# EAGLE board ControllerBoard 2 (EAGLE 5.03)

Size 100 x 80 mm. Coordinates in mm from the lower left corner, seen from the top.
Outline: 0,0 100,0 100,80 0,80 0,0
Copper layers (1*16): Top 0.035mm / dielectric 1.5mm / Bottom 0.035mm
Design rules "default": minimum track width 10mil, minimum drill 24mil, track to track 8mil, track to pad 8mil, pad to pad 8mil, via to via 8mil, smd to smd 8mil, copper to edge 40mil, drill to drill 8mil, minimum pad ring 10mil, minimum via ring 8mil, stop-mask expansion 4mil, vias tented up to drill 0mil, thermal gap 10mil

## Footprints (pad centres in the part's own frame; a part is rotated, then mirrored left to right if it is on the bottom)
3,81/1,4 = drill 1.397 pad 3.81 octagon: 1 0,0
EB22,5D = drill 2.007 pad 4.597 round: + -5.08,0 | drill 2.007 pad 4.597 octagon: - 5.08,0
E2,5-5 = drill 0.813 pad 1.6 round: + -1.27,0 | drill 0.813 pad 1.6 octagon: - 1.27,0
C025_050-045X075 = drill 0.813 octagon: 1 -1.27,0; 2 1.27,0; 3 3.81,0
TO220ABS = drill 1.016 long: A1 -2.54,-2.54; A2 2.54,-2.54; C 0,-2.54
DO41-10 = drill 1.118 round: A 5.08,0; C -5.08,0
DO35Z10 = drill 0.813 long: A 5.08,0; C -5.08,0
4,1 = hole 4.1: 0,0
DIL28-3 = drill 0.813 long: 1 -16.51,-3.81; 2 -13.97,-3.81; 3 -11.43,-3.81; 4 -8.89,-3.81; 5 -6.35,-3.81; 6 -3.81,-3.81; 7 -1.27,-3.81; 8 1.27,-3.81; 9 3.81,-3.81; 10 6.35,-3.81; 11 8.89,-3.81; 12 11.43,-3.81; 13 13.97,-3.81; 14 16.51,-3.81; 15 16.51,3.81; 16 13.97,3.81; 17 11.43,3.81; 18 8.89,3.81; 19 6.35,3.81; 20 3.81,3.81; 21 1.27,3.81; 22 -1.27,3.81; 23 -3.81,3.81; 24 -6.35,3.81; 25 -8.89,3.81; 26 -11.43,3.81; 27 -13.97,3.81; 28 -16.51,3.81
78XXS = drill 1.016 long: GND 0,-2.54; IN -2.54,-2.54; OUT 2.54,-2.54
1,6/0,9 = drill 0.914 pad 1.6 octagon: 1 0,0
TO220BV = drill 1.016 long: D 0,-2.54; G -2.54,-2.54; S 2.54,-2.54
TO126AV = drill 1.016 long: B 2.286,-1.27; C 0,-1.27; E -2.286,-1.27
HC49/S = drill 0.813 round: 1 -2.413,0; 2 2.413,0
0207/10 = drill 0.813 octagon: 1 -5.08,0; 2 5.08,0
MA05-2 = drill 1.016 octagon: 1 -5.08,-1.27; 2 -5.08,1.27; 3 -2.54,-1.27; 4 -2.54,1.27; 5 0,-1.27; 6 0,1.27; 7 2.54,-1.27; 8 2.54,1.27; 9 5.08,-1.27; 10 5.08,1.27
MA03-1 = drill 1.016 long: 1 -2.54,0; 2 0,0; 3 2.54,0

## Placement (x,y rotation side)
12V  [3,81/1,4]  3.81,66.04 90 top
B+1  [3,81/1,4]  97.79,60.96 0 top
B+2  [3,81/1,4]  76.2,60.96 0 top
B+3  [3,81/1,4]  53.34,60.96 0 top
B+4  [3,81/1,4]  -71.12,68.58 0 top  (outside the outline)
B-1  [3,81/1,4]  97.79,20.32 0 top
B-2  [3,81/1,4]  76.2,20.32 0 top
B-3  [3,81/1,4]  53.34,20.32 0 top
B-4  [3,81/1,4]  -91.44,68.58 0 top  (outside the outline)
C1  560u  [EB22,5D]  64.77,29.21 0 top
C2  560u  [EB22,5D]  64.77,52.07 0 top
C3  560u  [EB22,5D]  87.63,29.21 0 top
C4  560u  [EB22,5D]  87.63,52.07 0 top
C5  100u  [E2,5-5]  13.97,74.93 270 top
C6  24u  [E2,5-5]  30.48,77.47 0 top
C7  100n  [C025_050-045X075]  24.13,77.47 180 top
C8  22p  [C025_050-045X075]  6.35,45.72 180 top
C9  22p  [C025_050-045X075]  6.35,27.94 180 top
C10  100n  [C025_050-045X075]  27.94,34.29 0 top
C11  100n  [C025_050-045X075]  -17.78,60.96 0 top  (outside the outline)
C12  10n  [C025_050-045X075]  -26.67,60.96 0 top  (outside the outline)
C13  150p  [C025_050-045X075]  -35.56,60.96 0 top  (outside the outline)
D1  BYV32  [TO220ABS]  82.55,73.66 0 top
D2  BYV32  [TO220ABS]  59.69,73.66 0 top
D3  BYV32  [TO220ABS]  71.12,5.08 180 top
D4  BYV32  [TO220ABS]  93.98,5.08 180 top
D5  1N4004  [DO41-10]  25.4,72.39 180 top
D8  3.3v  [DO35Z10]  34.29,50.8 0 top
D9  3.3v  [DO35Z10]  34.29,39.37 180 top
GND  [3,81/1,4]  -45.72,68.58 0 top  (outside the outline)
H1  MOUNT-HOLE4.1  [4,1]  5.08,5.08 0 top
H2  MOUNT-HOLE4.1  [4,1]  45.72,16.51 0 top
H3  MOUNT-HOLE4.1  [4,1]  45.72,62.23 0 top
H4  MOUNT-HOLE4.1  [4,1]  5.08,74.93 0 top
IC1  MEGA8-P  [DIL28-3]  17.78,41.91 270 top
IC3  [78XXS]  48.26,73.66 0 top
M-1  [3,81/1,4]  93.98,76.2 0 top
M-2  [3,81/1,4]  77.47,76.2 0 top
M-3  [3,81/1,4]  59.69,76.2 0 top
M-4  [3,81/1,4]  93.98,2.54 0 top
M-5  [3,81/1,4]  77.47,2.54 0 top
M-6  [3,81/1,4]  59.69,2.54 0 top
PB0  [1,6/0,9]  10.16,25.4 0 top
PB1  [1,6/0,9]  25.4,25.4 0 top
PB2  [1,6/0,9]  25.4,27.94 0 top
PC3  [1,6/0,9]  25.4,53.34 0 top
PC4  [1,6/0,9]  25.4,55.88 0 top
PC5  [1,6/0,9]  25.4,58.42 0 top
PD2  [1,6/0,9]  10.16,50.8 0 top
PD3  [1,6/0,9]  10.16,48.26 0 top
PD4  [1,6/0,9]  10.16,45.72 0 top
PD5  [1,6/0,9]  10.16,33.02 0 top
PD7  [1,6/0,9]  10.16,27.94 0 top
Q1  IRF540  [TO220BV]  93.98,73.66 0 top
Q2  IRF540  [TO220BV]  71.12,73.66 0 top
Q3  IRF540  [TO220BV]  59.69,5.08 180 top
Q4  IRF540  [TO220BV]  82.55,5.08 180 top
Q5  BD139  [TO126AV]  45.72,41.91 180 top
Q6  BD139  [TO126AV]  38.1,73.66 0 top
Q7  10MHz  [HC49/S]  3.81,36.83 270 top
Q8  BD140  [TO126AV]  45.72,48.26 0 top
Q9  IRF540  [TO220BV]  48.26,5.08 180 top
R1  100  [0207/10]  59.69,66.04 0 top
R2  100  [0207/10]  82.55,66.04 0 top
R3  100  [0207/10]  59.69,12.7 0 top
R4  100  [0207/10]  82.55,12.7 0 top
R5  100  [0207/10]  -44.45,81.28 0 top  (outside the outline)
R6  47  [0207/10]  -57.15,81.28 0 top  (outside the outline)
R7  470  [0207/10]  -69.85,81.28 0 top  (outside the outline)
R8  4k7  [0207/10]  -82.55,81.28 0 top  (outside the outline)
R9  4k7  [0207/10]  -19.05,86.36 0 top  (outside the outline)
R12  100  [0207/10]  -31.75,86.36 0 top  (outside the outline)
R13  1k8  [0207/10]  -44.45,86.36 0 top  (outside the outline)
R14  1k  [0207/10]  34.29,46.99 0 top
R15  1k  [0207/10]  34.29,43.18 0 top
R16  47k  [0207/10]  -82.55,86.36 0 top  (outside the outline)
R17  47k  [0207/10]  -19.05,91.44 0 top  (outside the outline)
R18  270  [0207/10]  -31.75,91.44 0 top  (outside the outline)
R19  100  [0207/10]  -44.45,91.44 0 top  (outside the outline)
SV1  [MA05-2]  19.05,5.08 0 top
SV2  [MA03-1]  3.81,54.61 270 top

## Library data of the parts
12V B+1-B+4 B-1-B-4 GND M-1-M-6 PB0 PB1 PB2 PC3-PC5 PD2-PD5 PD7 = wirepad
C1-C13 R1-R9 R12-R19 = rcl
D1-D5 D8 D9 = diode
H1-H4 = holes
IC1 = atmel
IC3 = v-reg
Q1-Q6 Q8 Q9 = transistor-power
Q7 = crystal
SV1 SV2 = con-lstb

## Nets
+5V: C6.+ C7.1 IC1.7 IC3.OUT R9.2
+12V: 12V.1 D5.A Q8.E R17.2 R18.2
GND: B-1.1 B-2.1 B-3.1 B-4.1 C1.- C2.- C3.- C4.- C5.- C6.- C7.2 C8.1 C9.1 C10.2 C11.2 C12.2 GND.1 IC1.8 IC1.22 IC3.GND Q1.S Q2.S Q3.S Q4.S Q5.E Q6.E R6.1 R8.1 R12.1 R16.1 R19.1 SV1.4 SV1.6 SV1.8 SV1.10 SV2.3
N$2: IC1.24 Q6.C R7.2
N$3: Q9.S R6.2 R7.1
N$4: C13.1 Q6.B R8.2
N$5: C10.1 IC1.20
N$6: C11.1 IC1.21
N$7: Q2.G R1.2
N$8: Q1.G R2.2
N$9: Q3.G R3.2
N$10: Q4.G R4.2
N$11: IC1.28 PC5.1
N$12: C8.2 IC1.9 Q7.1
N$13: Q5.C Q8.C R1.1 R2.1 R3.1 R4.1 R5.1
N$14: C9.2 IC1.10 Q7.2
N$15: Q9.G R5.2
N$16: IC1.2 SV2.1
N$17: C5.+ D5.C IC3.IN
N$19: IC1.3 SV2.2
N$20: IC1.17 SV1.1
N$21: IC1.19 SV1.7
N$22: IC1.18 SV1.9
N$23: D1.A1 D1.A2 D2.A1 D2.A2 D3.A1 D3.A2 D4.A1 D4.A2 Q1.D Q2.D Q3.D Q4.D Q9.D
N$24: C13.2 D8.A D9.C IC1.12
N$25: C12.1 IC1.1 R9.1 SV1.5
N$26: IC1.23 R12.2 R13.1
N$27: Q8.B R14.2 R17.1
N$28: D9.A R15.1
N$29: D8.C R14.1
N$30: Q5.B R15.2 R16.2
N$31: IC1.25 R18.1 R19.2
N$32: IC1.11 PD5.1
N$33: IC1.26 PC3.1
N$34: IC1.27 PC4.1
N$36: IC1.4 PD2.1
N$37: IC1.5 PD3.1
N$38: IC1.6 PD4.1
N$40: IC1.13 PD7.1
N$41: IC1.14 PB0.1
N$42: IC1.15 PB1.1
N$43: IC1.16 PB2.1
N$44: M-1.1 M-2.1 M-3.1 M-4.1 M-5.1 M-6.1
V+: B+1.1 B+2.1 B+3.1 B+4.1 C1.+ C2.+ C3.+ C4.+ D1.C D2.C D3.C D4.C R13.2

## Tracks (layer width: path | path; a pad name or v marks a point on that pad's centre or on a via)
+5V  (4 unrouted)
+12V  (4 unrouted)
GND  (35 unrouted)
N$2  (2 unrouted)
N$3  (2 unrouted)
N$4  (2 unrouted)
N$5  (1 unrouted)
N$6  (1 unrouted)
N$7  (1 unrouted)
N$8  (1 unrouted)
N$9  (1 unrouted)
N$10  (1 unrouted)
N$11  (1 unrouted)
N$12  (2 unrouted)
N$13  (6 unrouted)
N$14  (2 unrouted)
N$15  (1 unrouted)
N$16  (1 unrouted)
N$17  (2 unrouted)
N$19  (1 unrouted)
N$20  (1 unrouted)
N$21  (1 unrouted)
N$22  (1 unrouted)
N$23  (12 unrouted)
N$24  (3 unrouted)
N$25  (3 unrouted)
N$26  (2 unrouted)
N$27  (2 unrouted)
N$28  (1 unrouted)
N$29  (1 unrouted)
N$30  (2 unrouted)
N$31  (2 unrouted)
N$32  (1 unrouted)
N$33  (1 unrouted)
N$34  (1 unrouted)
N$36  (1 unrouted)
N$37  (1 unrouted)
N$38  (1 unrouted)
N$40  (1 unrouted)
N$41  (1 unrouted)
N$42  (1 unrouted)
N$43  (1 unrouted)
N$44  (5 unrouted)
V+  (12 unrouted)